# EAGLE board rpibout (EAGLE 7.7.0)
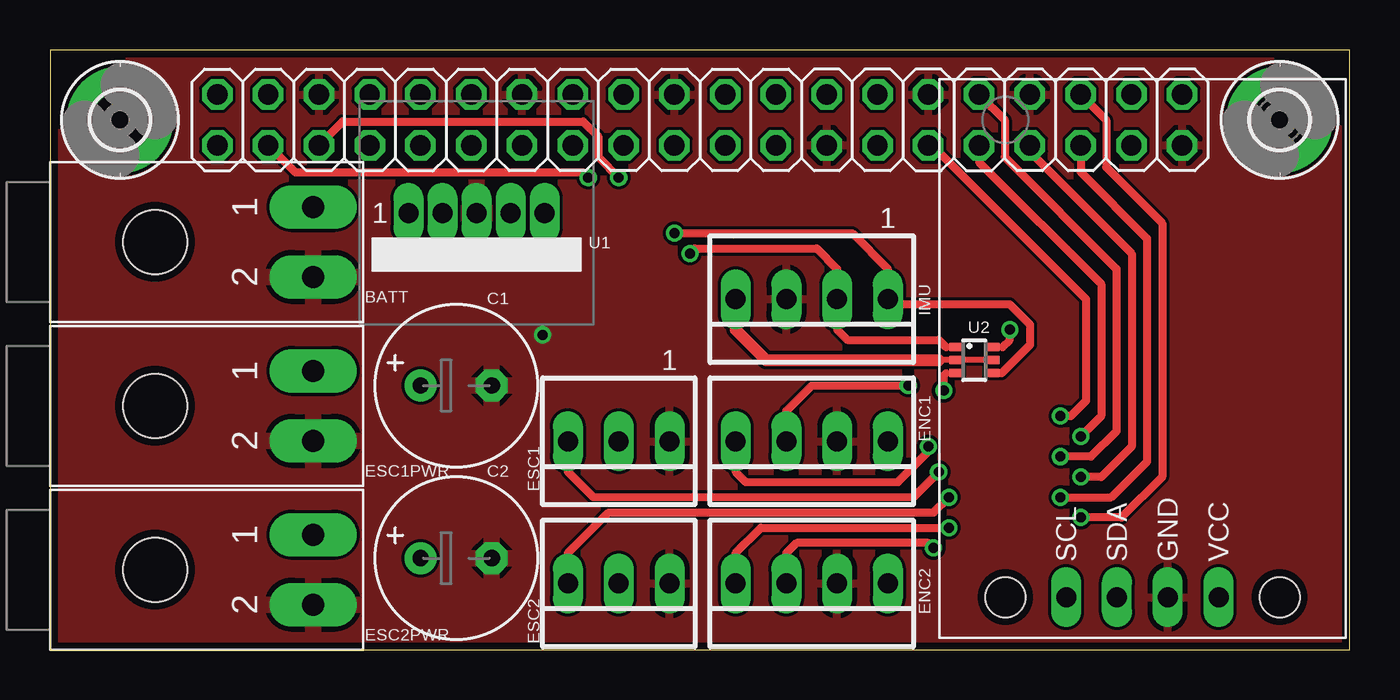
[diagram p0: board, top side]
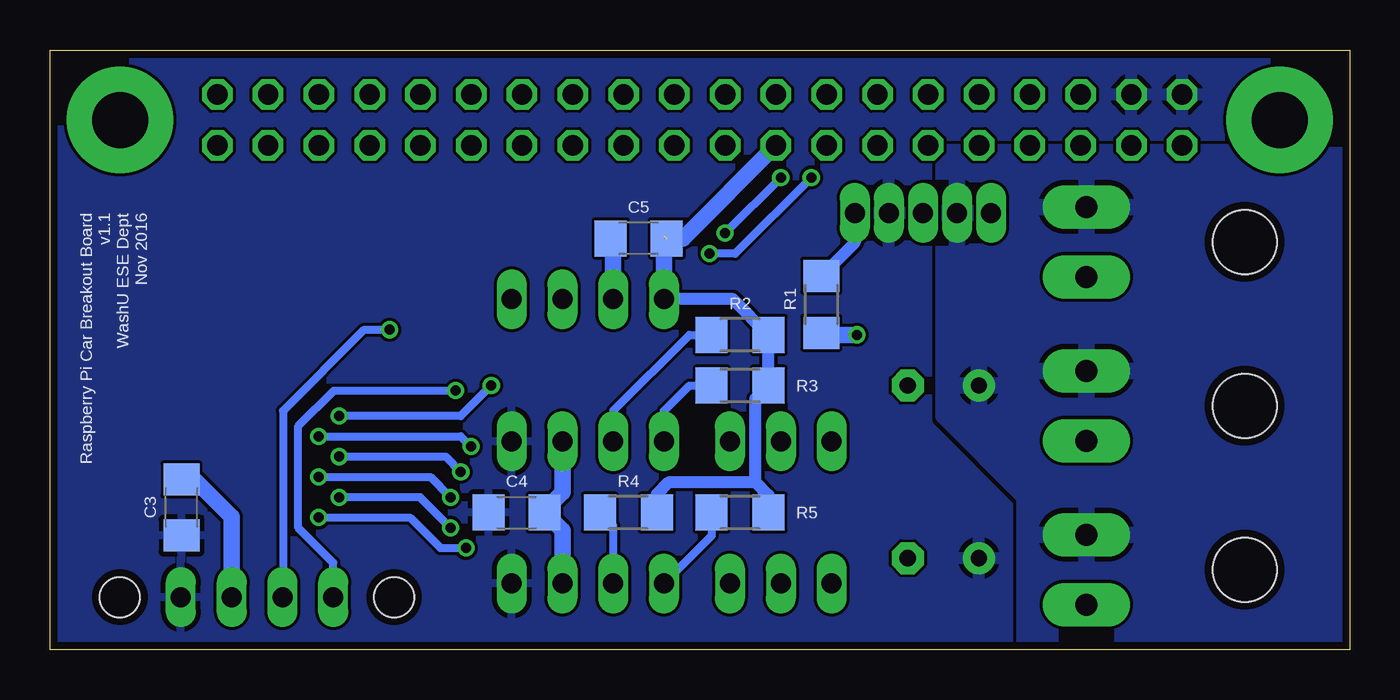
[diagram p1: board, bottom side, seen from below]

Size 65 x 30 mm. Coordinates in mm from the lower left corner, seen from the top.
Outline: 0,0 65,0 65,30 0,30 0,0
Copper layers (1*16): Top 0.0356mm / dielectric 1.5011mm / Bottom 0.0356mm
Design rules "oshpark-2layer *": minimum track width 6mil, minimum drill 13mil, track to track 6mil, track to pad 6mil, pad to pad 6mil, via to via 6mil, smd to smd 6mil, copper to edge 15mil, drill to drill 6mil, minimum pad ring 7mil, minimum via ring 7mil, stop-mask expansion 2.5mil, vias tented up to drill 0mil, thermal gap 10mil

## Footprints (pad centres in the part's own frame; a part is rotated, then mirrored left to right if it is on the bottom)
ULTRAFIT_2CIRC_RANGLE = drill 1.1 pad 2.184 long: 1 -1.75,7.91; 2 1.75,7.91 | hole 3.2: 0,0
E3,5-8 = drill 0.813 pad 1.6: + -1.778,0 | drill 0.813 pad 1.6 octagon: - 1.778,0
C1206 = smd 1.6 x 1.8: 1 -1.4,0; 2 1.4,0
22-23-2041 = drill 1 long: 1 -3.81,0; 2 -1.27,0; 3 1.27,0; 4 3.81,0
22-23-2031 = drill 1 long: 1 -2.54,0; 2 0,0; 3 2.54,0
2,8-PAD = drill 2.8 pad 5.334: B2,8 0,0
2X20 = drill 1.016 octagon: 1 -24.13,-1.27; 2 -24.13,1.27; 3 -21.59,-1.27; 4 -21.59,1.27; 5 -19.05,-1.27; 6 -19.05,1.27; 7 -16.51,-1.27; 8 -16.51,1.27; 9 -13.97,-1.27; 10 -13.97,1.27; 11 -11.43,-1.27; 12 -11.43,1.27; 13 -8.89,-1.27; 14 -8.89,1.27; 15 -6.35,-1.27; 16 -6.35,1.27; 17 -3.81,-1.27; 18 -3.81,1.27; 19 -1.27,-1.27; 20 -1.27,1.27; 21 1.27,-1.27; 22 1.27,1.27; 23 3.81,-1.27; 24 3.81,1.27; 25 6.35,-1.27; 26 6.35,1.27; 27 8.89,-1.27; 28 8.89,1.27; 29 11.43,-1.27; 30 11.43,1.27; 31 13.97,-1.27; 32 13.97,1.27; 33 16.51,-1.27; 34 16.51,1.27; 35 19.05,-1.27; 36 19.05,1.27; 37 21.59,-1.27; 38 21.59,1.27; 39 24.13,-1.27; 40 24.13,1.27
ADAFRUIT_MINI8X8_BACKPACK = drill 1 long: GND 2.032,8.89; SCL 2.032,13.97; SDA 2.032,11.43; VCC 2.032,6.35 | hole 2: 2.032,17.018; 2.032,3.302
R1206 = smd 1.6 x 1.803: 1 -1.422,0; 2 1.422,0
EDP_MODULE = drill 1 pad 1.27 long: P1 3.404,0; P2 1.702,0; P3 0,0; P4 -1.702,0; P5 -3.404,0
SOT363 = smd 0.4 x 0.7: 1 -0.65,-0.9; 2 0,-0.9; 3 0.65,-0.9; 4 0.65,0.9; 5 0,0.9; 6 -0.65,0.9

## Placement (x,y rotation side)
BATT  ULTRAFIT_2CIRC  [ULTRAFIT_2CIRC_RANGLE]  5.25,20.4 270 top
C1  220u  [E3,5-8]  20.32,13.21 0 top
C2  220u  [E3,5-8]  20.32,4.57 0 top
C3  1u  [C1206]  58.42,7.11 90 bottom
C4  1u  [C1206]  41.66,6.86 0 bottom
C5  1u  [C1206]  35.56,20.57 180 bottom
ENC1  22-23-2041  [22-23-2041]  38.1,10.41 180 top
ENC2  22-23-2041  [22-23-2041]  38.1,3.3 180 top
ESC1  22-23-2031  [22-23-2031]  28.45,10.41 180 top
ESC1PWR  ULTRAFIT_2CIRC  [ULTRAFIT_2CIRC_RANGLE]  5.25,12.2 270 top
ESC2  22-23-2031  [22-23-2031]  28.45,3.3 180 top
ESC2PWR  ULTRAFIT_2CIRC  [ULTRAFIT_2CIRC_RANGLE]  5.25,4 270 top
H1  MOUNT-PAD-ROUND2.8  [2,8-PAD]  61.5,26.5 0 top
H2  MOUNT-PAD-ROUND2.8  [2,8-PAD]  3.5,26.5 0 top
IMU  22-23-2041  [22-23-2041]  38.1,17.53 180 top
J1  [2X20]  32.5,26.5 0 top
LEDMATRIX  ADAFRUIT_MINI8X8_LED  [ADAFRUIT_MINI8X8_BACKPACK]  64.8,0.59 90 top
R1  267  [R1206]  26.42,17.27 90 bottom
R2  [R1206]  30.48,15.75 0 bottom
R3  [R1206]  30.48,13.21 0 bottom
R4  [R1206]  36.07,6.86 0 bottom
R5  [R1206]  30.48,6.86 0 bottom
U1  PTR08060W  [EDP_MODULE]  21.34,21.84 180 top
U2  BSS138BKS  [SOT363]  46.23,14.48 270 top

## Library data of the parts
BATT ESC1PWR ESC2PWR LEDMATRIX U1 U2 = rpibout
C1-C5 R1-R5 = resistor
ENC1 ENC2 IMU = con-molex; MF: MOLEX; MPN: 22-23-2041; OC_FARNELL: 1462920; OC_NEWARK: 38C0355
ESC1 ESC2 = con-molex; MF: MOLEX; MPN: 22-23-2031; OC_FARNELL: 1462950; OC_NEWARK: 30C0862
H1 H2 = holes
J1 = pinhead

## Nets
+3V3: C5.1 IMU.4 J1.17 R2.2 R3.2 R4.2 R5.2 U2.2 U2.5
+5V: C2.+ C3.1 C4.1 ENC1.1 ENC2.1 J1.2 J1.4 LEDMATRIX.VCC U1.P4
GND: BATT.2 C1.- C2.- C3.2 C4.2 C5.2 ENC1.2 ENC2.2 ESC1.1 ESC1PWR.2 ESC2.1 ESC2PWR.2 IMU.3 J1.6 J1.14 J1.20 J1.25 J1.30 J1.34 J1.39 LEDMATRIX.GND R1.1 U1.P3
GPIO5: ENC1.3 J1.29 R2.1
GPIO6: ENC1.4 J1.31 R3.1
GPIO12: ESC1.3 J1.32
GPIO13: ESC2.3 J1.33
GPIO16: ENC2.3 J1.36 R4.1
GPIO19: ENC2.4 J1.35 R5.1
N$2: R1.2 U1.P5
SCL3V3: IMU.1 J1.5 U2.4
SCL5V: LEDMATRIX.SCL U2.3
SDA3V3: IMU.2 J1.3 U2.1
SDA5V: LEDMATRIX.SDA U2.6
VBATT: BATT.1 C1.+ ESC1PWR.1 ESC2PWR.1 U1.P2

## Tracks (layer width: path | path; a pad name or v marks a point on that pad's centre or on a via)
+3V3  (1 unrouted)
  Top 0.305: 44.45,14.48 U2.2 U2.5
  Top 0.61: IMU.4 34.29,16 35.81,14.48 44.45,14.48
  Bottom 0.61: 29.72,8.38 29.72,12.55 R3.2 R2.2 30.84,17.53 IMU.4 | R4.2 34.65,7.77 34.04,8.38 29.72,8.38 | R5.2 29.06,7.72 29.72,8.38
  Bottom 0.813: IMU.4 34.29,20.7 | C5.1 33.35,20.57 J1.17
+5V
  pour Bottom (rank 2): -0.51,30.48 -0.51,-0.51 65.53,-0.51 65.53,30.48
  pour Bottom (rank 2): 6.6,-1.02 6.6,30.99 24.38,30.99 24.38,-1.02
GND  (via drill 0.5)
  Bottom 0.813: LEDMATRIX.GND 55.91,6.64 57.91,8.64 58.3,8.64 C3.2 | C5.2 36.83,20.44 IMU.3 | v24.64,15.75 26.42,15.75 R1.1 | ENC2.2 39.37,5.97 C4.2 | ENC1.2 39.37,7.87 40.13,7.11
  pour Top: -0.51,30.48 -0.51,-0.51 65.53,-0.51 65.53,30.48
  pour Top: 7.62,-1.02 7.62,24.89 24.38,24.89 24.38,-1.02
GPIO5  (via drill 0.5)
  Top 0.406: ENC1.3 36.83,11.94 38.1,13.21 v42.93,13.21 | v50.55,11.68 51.05,11.68 51.82,12.45 51.82,17.53 44.11,25.23 J1.29
  Bottom 0.406: R2.1 33.02,15.75 36.83,11.94 ENC1.3 | v42.93,13.21 44.45,11.68 v50.55,11.68
GPIO6  (via drill 0.5)
  Top 0.406: ENC1.4 34.29,8.89 34.8,8.38 42.42,8.38 43.94,9.91 v43.94,10.16 | J1.31 46.47,24.4 52.58,18.29 52.58,11.68 v51.56,10.67
  Bottom 0.406: ENC1.4 34.29,11.94 33.02,13.21 R3.1 | v51.56,10.67 44.45,10.67 v43.94,10.16
GPIO12  (via drill 0.5)
  Top 0.406: v44.45,8.89 43.18,7.62 27.18,7.62 25.91,8.89 ESC1.3 | J1.32 47.75,26.49 47.75,24.64 53.34,19.05 53.34,10.92 52.07,9.65 v50.55,9.65
  Bottom 0.406: v50.55,9.65 45.21,9.65 v44.45,8.89
GPIO13  (via drill 0.5)
  Top 0.406: J1.33 49.01,24.9 54.1,19.81 54.1,10.16 52.58,8.64 v51.56,8.64 | ESC2.3 25.91,4.83 27.94,6.86 44.2,6.86 v44.96,7.62
  Bottom 0.406: v44.96,7.62 45.97,8.64 v51.56,8.64
GPIO16  (via drill 0.5)
  Top 0.406: J1.36 52.83,26.49 52.83,24.13 55.63,21.34 55.63,8.64 53.59,6.6 v51.56,6.6 | v44.2,5.08 43.94,5.33 37.34,5.33 36.83,4.83 ENC2.3
  Bottom 0.406: v51.56,6.6 46.99,6.6 45.47,5.08 v44.2,5.08 | R4.1 36.83,6.2 ENC2.3
GPIO19  (via drill 0.5)
  Top 0.406: J1.35 51.55,23.89 54.86,20.57 54.86,9.4 53.09,7.62 v50.55,7.62 | ENC2.4 34.29,4.83 35.56,6.1 v44.96,6.1
  Bottom 0.406: v44.96,6.1 46.48,7.62 v50.55,7.62 | R5.1 31.9,5.69 ENC2.4
N$2
  Bottom 0.61: U1.P5 24.74,20.37 R1.2
SCL3V3  (via drill 0.5)
  Top 0.305: U2.4 47.61,13.83
  Top 0.406: 47.61,13.83 49.02,15.24 49.02,16.26 48.01,17.27 42.16,17.27 IMU.1 41.91,19.05 40.13,20.83 v31.24,20.83 | J1.5 14.64,26.42 26.67,26.42 27.43,25.65 27.43,24.64 v28.45,23.62
  Bottom 0.406: v28.45,23.62 v31.24,20.83
SCL5V  (via drill 0.5)
  Top 0.305: 44.82,13.83 U2.3
  Top 0.406: 44.82,13.83 44.7,13.72 v44.7,12.95
  Bottom 0.406: LEDMATRIX.SCL 50.83,4.35 52.58,6.1 52.58,11.18 50.8,12.95 v44.7,12.95
SDA3V3  (via drill 0.5)
  Top 0.305: U2.1 44.82,15.13
  Top 0.406: 44.82,15.13 44.45,15.49 39.88,15.49 39.37,16 IMU.2 39.37,19.05 38.35,20.07 32.26,20.07 v32,19.81 | J1.3 12.26,23.88 26.67,23.88 v26.92,23.62
  Bottom 0.406: v26.92,23.62 30.73,19.81 v32,19.81
SDA5V  (via drill 0.5)
  Top 0.305: U2.6 47.64,15.13
  Top 0.406: 47.64,15.13 48.01,15.49 v48.01,16
  Bottom 0.406: v48.01,16 49.28,16 53.34,11.94 53.34,2.66 LEDMATRIX.SDA
VBATT
  pour Bottom: -0.51,24.89 20.32,24.89 20.32,11.68 16.26,7.62 16.26,-0.51 -0.51,-0.51

## Text on the board
tPlace: 1 | 1
bPlace: Raspberry Pi Car Breakout Board / v1.1 / WashU ESE Dept / Nov 2016